# Altium PCB URESP_PULSER.PcbDoc
Units mm, origin at the board's own origin, x right, y up, seen from the top; angles counter-clockwise.
Board outline 48.66 x 70 mm, 2 copper layers (Top Layer, Bottom Layer); 54 components, 75 nets, 259 pads, 70 vias.
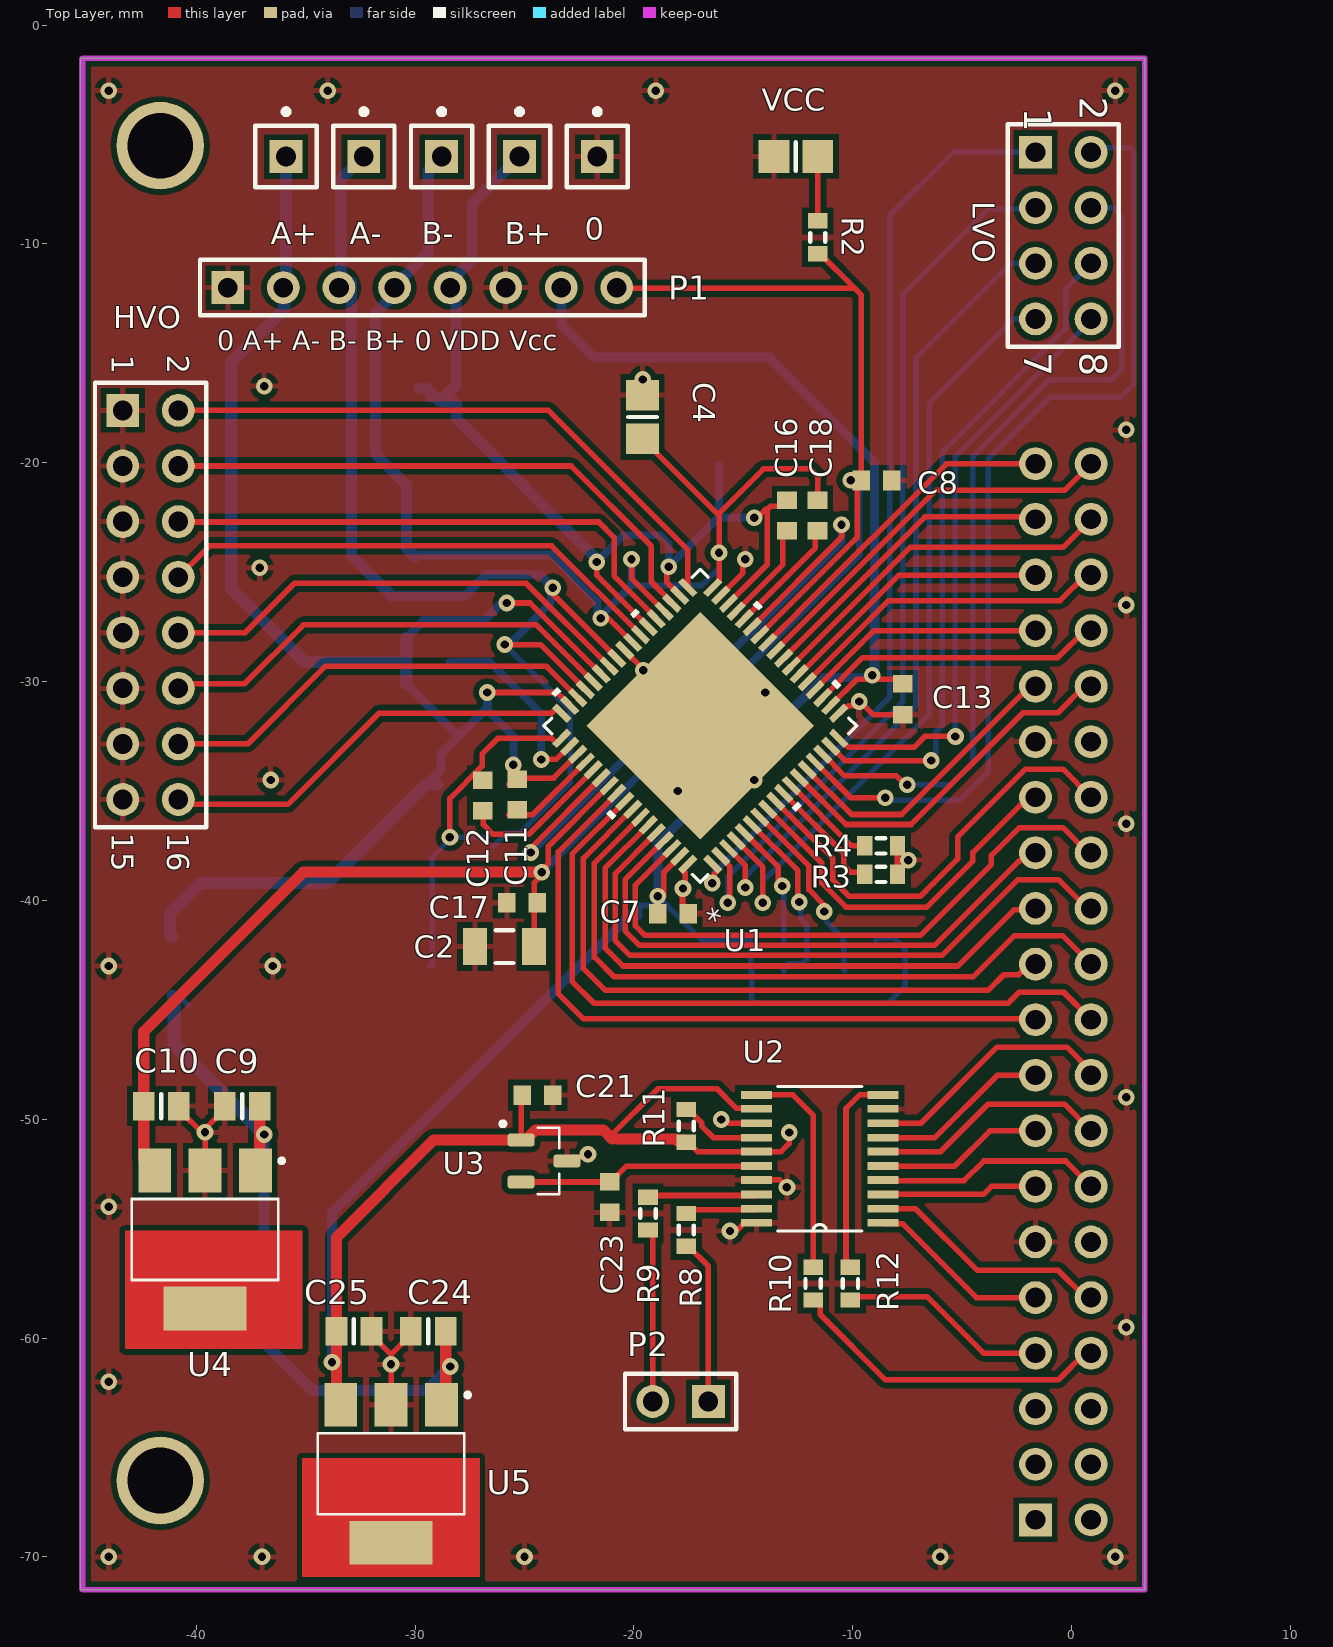
[diagram p0: Top Layer view]
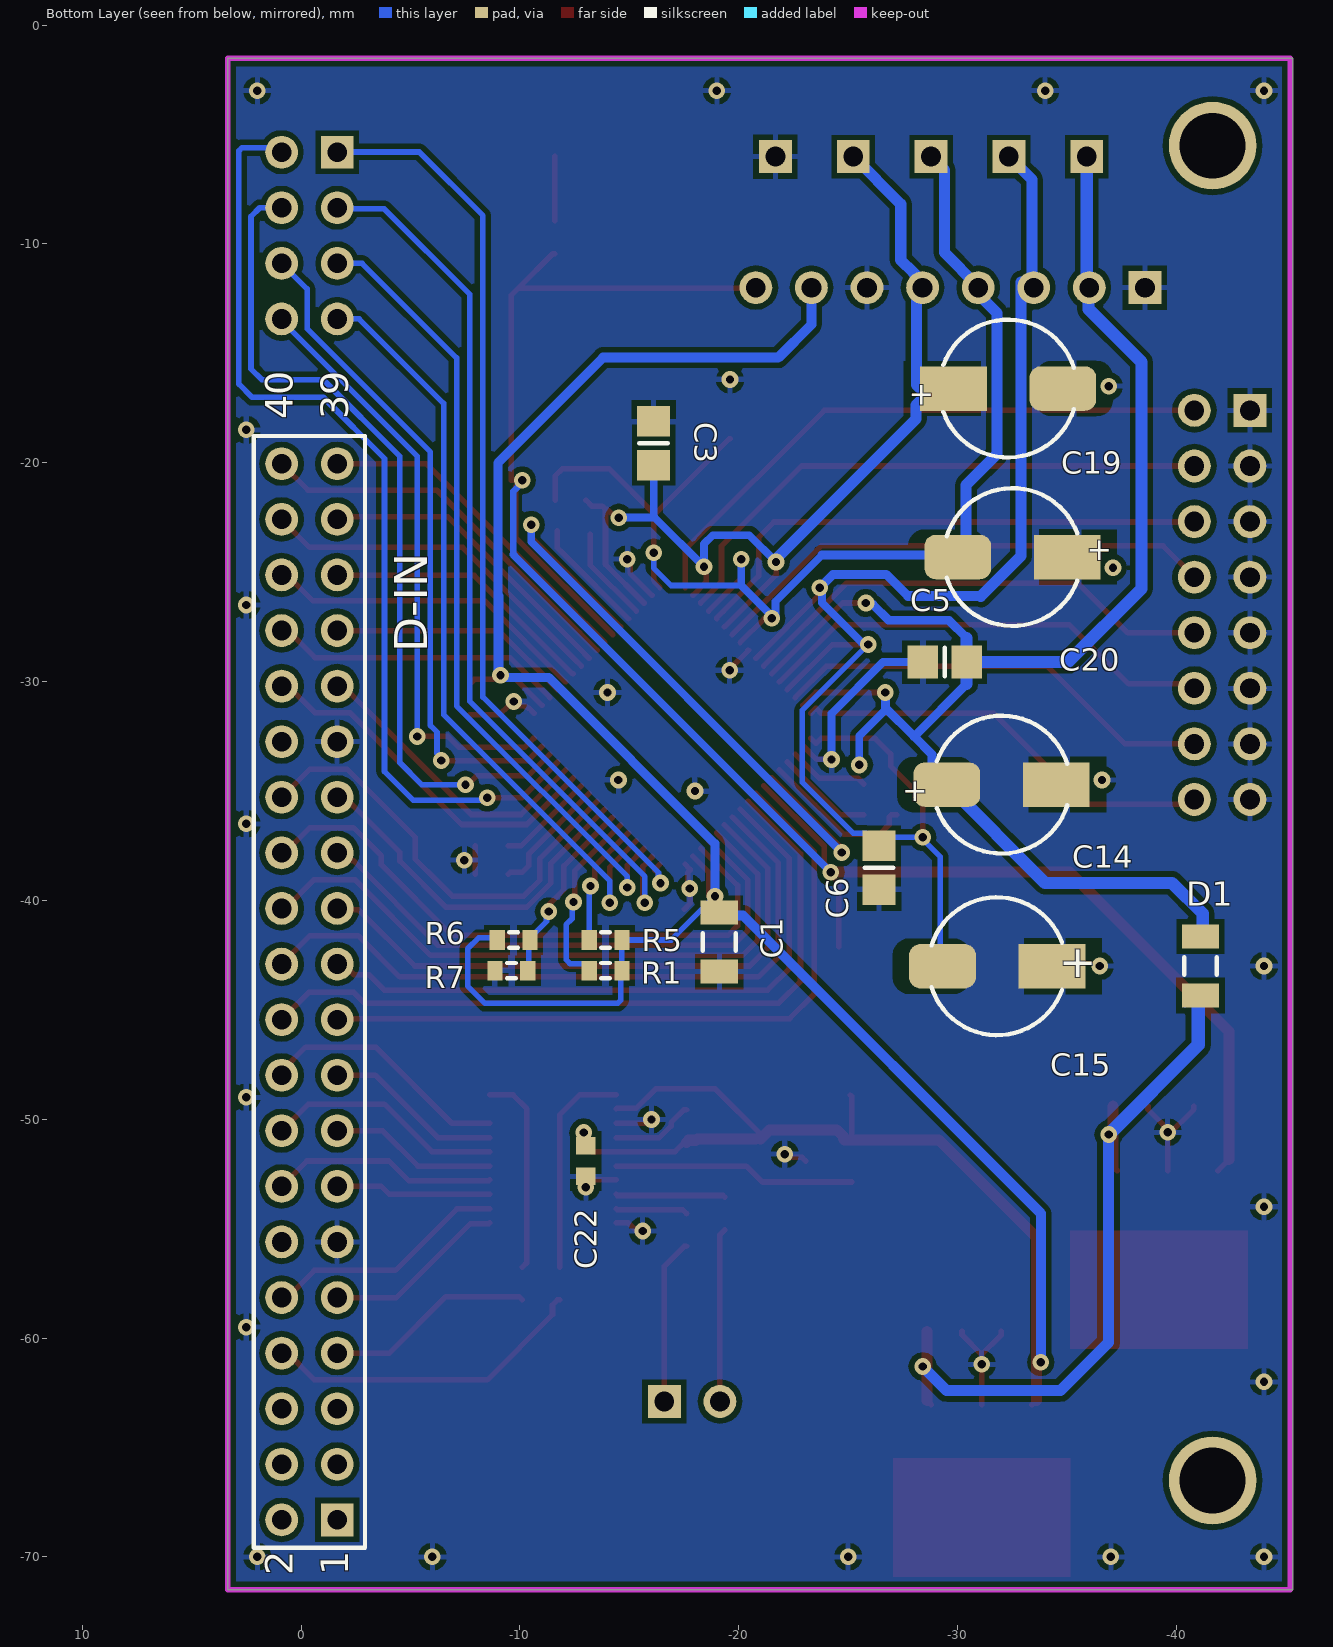
[diagram p1: Bottom Layer view, seen from below]

## Layer stack, top to bottom
Top Solder: solder mask 0.0102, Solder Resist, Dk 3.5
Top Layer: signal copper 0.0356
Dielectric 1: dielectric 0.32, FR-4, Dk 4.8
Bottom Layer: signal copper 0.0356
Bottom Solder: solder mask 0.0102, Solder Resist, Dk 3.5

## Board outline
-45.31,-71.51 -45.31,-1.51 3.35,-1.51 3.35,-71.51

## Design rules (kind name [scope] priority, off if disabled: settings)
Clearance [All] p1: gap=0.254 ignorepadtopadclearanceinfootprint=FALSE except(0: Arc-Hole Track-Hole SMDPad-Hole THPad-Hole Via-Hole Fill-Hole Poly-Hole Region-Hole Text-Hole; 0.203: Arc-Arc Arc-Track Arc-SMDPad Arc-THPad Arc-Via Arc-Text Track-Track Track-SMDPad Track-THPad Track-Via Track-Text SMDPad-SMDPad SMDPad-THPad SMDPad-Text THPad-Text Via-Text Fill-Text Poly-Text Region-Text Text-Text)
PolygonConnect [All] p1: connectstyle=Relief reliefconductorwidth=0.254 reliefentries=4 polygonreliefangle="90 Angle" airgapwidth=0.254
RoutingVias [All] p1: holewidth=0.711 width=1.27 viastyle="Through Hole" minholewidth=0.3 minwidth=0.635 maxholewidth=0.711 maxwidth=1.27
SolderMaskExpansion [All] p1: expansion=0.102 istentingtop=FALSE
Width [All] p1: maxlimit=0.762 minlimit=0.203 preferedwidth=0.254 minimp=50.000000 maximp=50.000000 favimp=50.000000
30 further rules are at their usual default settings.

## Classes and differential pairs
component class URESP_PULSER_2: C9 C10 C21 C22 C23 C24 C25 D1 P2 R8 R9 R10 R11 R12 U2 U3 U4 U5
component class URESP_PULSER: 0 A+ A- B+ B- C1 C2 C3 C4 C5 C6 C7 C8 C11 C12 C13 C14 C15 C16 C17 C18 C19 C20 D-IN HVO LVO P1 R1 R2 R3 R4 R5 R6 R7 U1 VCC

## Components (designator, comment, footprint, x,y, rotation, side; value= is the part's Value field where it differs from the comment)
0 "" PIN1 -21.676,-6.01 r0 top
A+ "" PIN1 -35.9,-6.01 r0 top
A- "" PIN1 -32.344,-6.01 r0 top
B+ "" PIN1 -25.232,-6.01 r0 top
B- "" PIN1 -28.788,-6.01 r0 top
C1 "" C1206 -19.11,-41.91 r270 bottom value=10uF
C2 "" C1206 -25.91,-42.11 r180 top value=10uF
C3 "" 6-0805_M -16.11,-19.11 r270 bottom value=100nF
C4 "" 6-0805_M -19.61,-17.91 r270 top value=100nF
C5 "" 6-0805_M -29.41,-29.11 r180 bottom value=100nF
C6 "" 6-0805_M -26.41,-38.51 r90 bottom value=100nF
C7 "" 1608[0603] -18.21,-40.61 r180 top value=100nF
C8 "" 1608[0603] -8.91,-20.81 r180 top value=100nF
C9 "" 6-0805_L -37.9,-49.4 r0 top value=10uF
C10 "" 6-0805_L -41.6,-49.4 r180 top value=10uF
C11 "" 1608[0603] -25.335,-35.16 r270 top value=1uF-10V
C12 "" 1608[0603] -26.91,-35.21 r270 top value=1uF-10V
C13 "" 1608[0603] -7.71,-30.81 r90 top value=100nF
C14 "" CAPPR5-6.3X5#1 -32.01,-34.71 r180 bottom value=10uF
C15 "" CAPPR5-6.3x5 -31.81,-43.01 r0 bottom value=10uF
C16 "" 1608[0603] -13.01,-22.41 r270 top value=1uF-10V
C17 "" 1608[0603] -25.11,-40.11 r0 top value=1uF
C18 "" 1608[0603] -11.61,-22.41 r270 top value=1uF-10V
C19 "" CAPPR5-6.3X5#2 -32.31,-16.61 r180 bottom value=10uF
C20 "" CAPPR5-6.3X5#2 -32.51,-24.31 r0 bottom value=10uF
C21 "" 1608[0603] -24.4,-48.9 r180 top value=100nF
C22 "" 1608[0603] -13.01,-51.91 r90 bottom value=100nF
C23 "" 1608[0603] -21.11,-53.56 r90 top value=100nF
C24 "" 6-0805_L -29.4,-59.7 r0 top value=10uF
C25 "" 6-0805_L -32.8,-59.7 r180 top value=10uF
D1 "D Schottky" C1206 -41.1,-43 r270 bottom
D-IN "" HDR2X20 -1.65,-68.31 r90 bottom
HVO "" HDR2X8 -43.36,-17.61 r270 top
LVO "Header 4X2" HDR2X4 -1.65,-5.81 r270 top
P1 "Header 8" HDR1X8 -38.56,-12 r0 top
P2 "" HDR1X2 -16.6,-62.9 r180 top
R1 "" J1-0603 -13.91,-43.21 r0 bottom value=10K
R2 "" J1-0603 -11.6,-9.7 r270 top value=1K
R3 "" J1-0603 -8.71,-38.81 r180 top value=1K
R4 "" J1-0603 -8.71,-37.51 r180 top value=1K
R5 "" J1-0603 -13.91,-41.81 r0 bottom value=1K
R6 "" J1-0603 -9.71,-41.81 r180 bottom value=10K
R7 "" J1-0603 -9.61,-43.21 r180 bottom value=10K
R8 "" J1-0603 -17.61,-55.06 r270 top value="0 Ohm"
R9 "" J1-0603 -19.36,-54.31 r270 top value="0 Ohm"
R10 "" J1-0603 -11.81,-57.51 r90 top value=1K
R11 "" J1-0603 -17.61,-50.31 r90 top value=10K
R12 "" J1-0603 -10.11,-57.51 r90 top value=1K
U1 "MAX14808ETK+T" 21-0142E_T6800-2 -16.972,-32.025 r135 top value=Value
U2 "AD7302BRUZ-REEL7" SOP65P637X110-20N -11.51,-51.81 r180 top
U3 "ADR280ARTZ-REEL7" SOT96P237X112-3N -24.11,-51.91 r0 top
U4 "LT1129IST-5#PBF" SOT230P700X180-4N -39.6,-55.5 r180 top
U5 "LT1129IST-5#PBF" SOT230P700X180-4N -31.1,-66.2 r180 top
VCC "LED3" 6-0805_M -12.6,-6 r180 top

## Footprints (in the part's own frame and the unit in brackets; to place one, negate y for a bottom-side part, rotate by r counter-clockwise, add the part's x,y. Pads: shape width x height; smd on the part's side, far side on the other; paste and mask are expansions set on the pad)
6-0805_L [mm] "Chip Resistor, Body 2.0x1.2mm, IPC High Density"
  rect 1x1.3 smd: 1(-0.8,0) 2(0.8,0)
  silkscreen extent 0,-0.55 0,0.55, body extent -1.07,-0.7 1.07,0.7, height 0.7
6-0805_M [mm] "Chip Resistor, Body 2.0x1.2mm, IPC Low Density"
  rect 1.4x1.5 smd: 1(-1,0) 2(1,0)
  silkscreen extent 0,-0.65 0,0.65, body extent -1.07,-0.7 1.07,0.7, height 0.7
21-0142E_T6800-2 [mil]
  rect 38x12 smd: 1(-192,160) 2(-192,140) 3(-192,120) 4(-192,100) 5(-192,80) 6(-192,60) 7(-192,40) 8(-192,20) 9(-192,0) 10(-192,-20) 11(-192,-40) 12(-192,-60) 13(-192,-80) 14(-192,-100) 15(-192,-120) 16(-192,-140) 17(-192,-160) 35(192,-160) 36(192,-140) 37(192,-120) 38(192,-100) 39(192,-80) 40(192,-60) 41(192,-40) 42(192,-20) 43(192,0) 44(192,20) 45(192,40) 46(192,60) 47(192,80) 48(192,100) 49(192,120) 50(192,140) 51(192,160)
  rect 12x38 smd: 18(-160,-192) 19(-140,-192) 20(-120,-192) 21(-100,-192) 22(-80,-192) 23(-60,-192) 24(-40,-192) 25(-20,-192) 26(0,-192) 27(20,-192) 28(40,-192) 29(60,-192) 30(80,-192) 31(100,-192) 32(120,-192) 33(140,-192) 34(160,-192) 52(160,192) 53(140,192) 54(120,192) 55(100,192) 56(80,192) 57(60,192) 58(40,192) 59(20,192) 60(0,192) 61(-20,192) 62(-40,192) 63(-60,192) 64(-80,192) 65(-100,192) 66(-120,192) 67(-140,192) 68(-160,192)
  rect 290x290 smd paste-153: 69(0,0)
  silkscreen extent -231,-231 231,231
1608[0603] [mm] "Chip Capacitor, Body 1.6x0.8mm, IPC High Density"
  rect 0.8x0.9 smd: 1(-0.7,0) 2(0.7,0)
  body extent -0.87,-0.48 0.87,0.48, height 1.3
C1206 [mm] "Chip Capacitor, Body 3.2x1.6mm, IPC High Density"
  rect 1.1x1.7 smd: 1(-1.35,0) 2(1.35,0)
  silkscreen extent -0.4,-0.75 0.4,0.75, body extent -1.7,-0.9 1.7,0.9, height 1.3
CAPPR5-6.3X5#1 [mil] "Capacitor, Electrolytic, Radial; Body 6.3 x 5 mm (Dia.xH typ); Pin Spacing 5 mm (typ)"
  rrect50% 120x80 smd: 1(-98.43,0)
  rect 120x80 smd: 2(98.43,0)
  silkscreen extent -117,-124 118,124
CAPPR5-6.3X5#2 [mil] "Capacitor, Electrolytic, Radial; Body 6.3 x 5 mm (Dia.xH typ); Pin Spacing 5 mm (typ)"
  rect 120x80 smd: 1(-98.43,0)
  rrect50% 120x80 smd: 2(98.43,0)
  silkscreen extent -117,-124 118,124
CAPPR5-6.3x5 [mil] "Capacitor, Electrolytic, Radial; Body 6.3 x 5 mm (Dia.xH typ); Pin Spacing 5 mm (typ)"
  rect 120x80 smd: 1(-98.43,0)
  rrect50% 120x80 smd: 2(98.43,0)
  silkscreen extent -117,-124 118,124
HDR1X2 [mm] "Connector; Header; 2 Position"
  rect 1.5x1.5 hole 0.9: 1(0,0)
  round 1.5 hole 0.9: 2(2.54,0)
  silkscreen extent -1.27,-1.27 3.81,1.27
HDR1X8 [mm] "Connector; Header; 8 Position"
  rect 1.5x1.5 hole 0.9: 1(0,0)
  round 1.5 hole 0.9: 2(2.54,0) 3(5.08,0) 4(7.62,0) 5(10.16,0) 6(12.7,0) 7(15.24,0) 8(17.78,0)
  silkscreen extent -1.27,-1.27 19.05,1.27
HDR2X4 [mm] "Connector; Header; 4x2 Position"
  rect 1.5x1.5 hole 0.9: 1(0,0)
  round 1.5 hole 0.9: 2(0,2.54) 3(2.54,0) 4(2.54,2.54) 5(5.08,0) 6(5.08,2.54) 7(7.62,0) 8(7.62,2.54)
  silkscreen extent -1.27,-1.27 8.89,3.81
HDR2X8 [mm] "Connector; Header; 8x2 Position"
  rect 1.5x1.5 hole 0.9: 1(0,0)
  round 1.5 hole 0.9: 2(0,2.54) 3(2.54,0) 4(2.54,2.54) 5(5.08,0) 6(5.08,2.54) 7(7.62,0) 8(7.62,2.54) 9(10.16,0) 10(10.16,2.54) 11(12.7,0) 12(12.7,2.54) 13(15.24,0) 14(15.24,2.54) 15(17.78,0) 16(17.78,2.54)
  silkscreen extent -1.27,-1.27 19.05,3.81
HDR2X20 [mm] "Connector; Header; 20x2 Position"
  rect 1.5x1.5 hole 0.9: 1(0,0)
  round 1.5 hole 0.9: 2(0,2.54) 3(2.54,0) 4(2.54,2.54) 5(5.08,0) 6(5.08,2.54) 7(7.62,0) 8(7.62,2.54) 9(10.16,0) 10(10.16,2.54) 11(12.7,0) 12(12.7,2.54) 13(15.24,0) 14(15.24,2.54) 15(17.78,0) 16(17.78,2.54) 17(20.32,0) 18(20.32,2.54) 19(22.86,0) 20(22.86,2.54) 21(25.4,0) 22(25.4,2.54) 23(27.94,0) 24(27.94,2.54) 25(30.48,0) 26(30.48,2.54) 27(33.02,0) 28(33.02,2.54) 29(35.56,0) 30(35.56,2.54) 31(38.1,0) 32(38.1,2.54) 33(40.64,0) 34(40.64,2.54) 35(43.18,0) 36(43.18,2.54) 37(45.72,0) 38(45.72,2.54) 39(48.26,0) 40(48.26,2.54)
  silkscreen extent -1.27,-1.27 49.53,3.81
J1-0603 [mm] "Chip Resistor, Body 1.6x0.8mm, IPC High Density"
  rect 0.7x0.9 smd: 1(-0.75,0) 2(0.75,0)
  silkscreen extent -0.2,-0.35 0.2,0.35, body extent -0.85,-0.48 0.85,0.48, height 0.9
PIN1 [mm] "Connector; Plug"
  rect 1.5x1.5 hole 0.9: 1(0,0)
  silkscreen extent -1.4,-1.4 1.4,2.17
SOP65P637X110-20N [mil]
  rect 56x14 smd: 1(-114,115) 2(-114,90) 3(-114,64) 4(-114,38) 5(-114,13) 6(-114,-13) 7(-114,-38) 8(-114,-64) 9(-114,-90) 10(-114,-115) 11(114,-115) 12(114,-90) 13(114,-64) 14(114,-38) 15(114,-13) 16(114,13) 17(114,38) 18(114,64) 19(114,90) 20(114,115)
  silkscreen extent -76,-130 76,130
SOT96P237X112-3N [mm]
  rrect50% 1.25x0.61 smd: 1(-1.05,0.96) 2(-1.05,-0.96) 3(1.05,0)
  silkscreen extent -1.98,-1.52 0.7,1.8
SOT230P700X180-4N [mm]
  rect 1.5x2 smd: 1(-2.3,-3.15) 2(0,-3.15) 3(2.3,-3.15)
  rect 3.8x2 smd: 4(0,3.15)
  silkscreen extent -3.6,-3.7 3.35,1.85, body extent -3.25,-3.5 3.25,3.5, height 1.8

## Part data
0 A+ A- B+ B-: library part Socket, "Socket", LatestRevisionDate=17-Jul-2002, LatestRevisionNote="Re-released for DXP Platform.", Publisher="Altium Limited"
C1 C2: library part "Cap Pol3", "Polarized Capacitor (Surface Mount)", LatestRevisionDate=29-May-2009, LatestRevisionNote="IPC-7351 Footprint Added.", PackageDescription="Chip Capacitor", PackageReference=C0805, Published=8-Jun-2000, Publisher="Altium Limited"
C3 C4 C5 C6 C7 C8 C9 C10 C11 C12 C13 C14 C15 C16 C17 C18 C19 C20 C21 C22 C23 C24 C25: library part "Cap Semi", "Capacitor (Semiconductor SIM Model)", LatestRevisionDate=29-May-2009, LatestRevisionNote="IPC-7351 Footprint Added.", PackageDescription="Chip Capacitor", PackageReference=C1206, Published=8-Jun-2000, Publisher="Altium Limited"
D1: "Schottky Diode", Code_JEDEC=DO-214-AA, LatestRevisionDate=17-Jul-2002, LatestRevisionNote="Re-released for DXP Platform.", PackageDescription="DO-214-AA/SMB; 2 C-Bend Leads; Body 5.3 x 3.6 mm, inc. leads (LxW)", PackageReference=SMB, Published=8-Jun-2000, Publisher="Altium Limited"
D-IN: library part "Header 20X2", "Header, 20-Pin, Dual row", LatestRevisionDate=17-Jul-2002, LatestRevisionNote="Re-released for DXP Platform.", Publisher="Altium Limited"
HVO: library part "Header 8X2H", "Header, 8-Pin, Dual row, Right Angle", LatestRevisionDate=17-Jul-2002, LatestRevisionNote="Re-released for DXP Platform.", Publisher="Altium Limited"
LVO: "Header, 4-Pin, Dual row", LatestRevisionDate=17-Jul-2002, LatestRevisionNote="Re-released for DXP Platform.", Publisher="Altium Limited"
P1: "Header, 8-Pin", LatestRevisionDate=17-Jul-2002, LatestRevisionNote="Re-released for DXP Platform.", Publisher="Altium Limited"
P2: library part "Header 2", "Header, 2-Pin", LatestRevisionDate=17-Jul-2002, LatestRevisionNote="Re-released for DXP Platform.", Publisher="Altium Limited"
R1 R2 R3 R4 R5 R6 R7 R8 R9 R10 R11 R12: library part Res3, "Resistor", LatestRevisionDate=29-May-2009, LatestRevisionNote="IPC-7351 Footprint Added.", PackageDescription="Chip Resistor", PackageReference=J1-0603, Published=8-Jun-2000, Publisher="Altium Limited"
U1: "Imported", Manufacturer_Name=Maxim, Manufacturer_Part_Number=MAX14808ETK+T, RefDes=RefDes, Type=DEV, Vendor=Maxim
U2: "8-Bit Digital-to-Analog Converters", Package=None, Availability=Unavailable, MF="{'manufacturer': u'Analog Devices'}", MP=AD7302BRUZ-REEL7, Price=None
U3 U4 U5: Package=None, Availability=Unavailable, MF="{'manufacturer': u'Analog Devices'}", Price=None
  U3: MP=ADR280ARTZ-REEL7
  U4 U5: MP=LT1129IST-5#PBF
VCC: "Typical BLUE SiC LED", DatasheetVersion=16-Apr-2002, LatestRevisionDate=17-Dec-2003, LatestRevisionNote="PCB Footprint replaced.", PackageDescription="SM LED; 2 C-Bend Leads; Body 3.5 x 2.8 x 1.9 mm, inc leads (LxWxH typ)", PackageReference=3.5X2.8X1.9, PackageVersion=16-Apr-2002, Published=8-Jun-2000, Publisher="Altium Limited"

## Free pads (board coordinates)
  round 4 hole 3: 0(-41.65,-66.51) 0(-41.65,-5.51)

## Via types
v1: diameter 0.762, hole 0.381, Top Layer to Bottom Layer, tented both sides, 70 vias

## Nets (pads, with @x,y where several pads share a name; then routed paths per layer and width w, separated by ;. In a path a pad name is that pad's centre, name@x,y a point inside that pad or via, vN(x,y) a via of type N, cw(c..) or ccw(c..) an arc to the next point about the centre after c; other vN are vias at no path point)
+HVA: A+.1 C5.2 C11.1 C14.1 D1.1 P1.2 U1.46 U1.50 U1.54 | length 79.2
  Top Layer w0.254: v1(-26.698,-30.5) -23.526,-30.5 U1.50 ; v1(-25.81,-26.41) -24.742,-26.41 U1.46 ; C11.1@-25.71,-34.685 -25.437,-34.412 -23.67,-34.412 U1.54
  Bottom Layer w0.254: -26.698,-31.302 v1(-26.698,-30.5) ; v1@-25.878,-26.478 v1(-25.81,-26.41)
  Bottom Layer w0.356: -26.698,-31.302 -25.51,-32.49 v1(-25.51,-33.81)
  Bottom Layer w0.406: -30.41,-30.11 -28.01,-32.51 ; -30.41,-28.01 -29.6,-27.2 -26.848,-27.2 -26.126,-26.478 v1@-25.878,-26.478 ; C14.1 -28.822,-34.022 -28.822,-33.322 -28.01,-32.51 ; v1(-26.698,-30.5) -26.698,-31.198 -28.01,-32.51
  Bottom Layer w0.559: D1.1 -41.2,-41.55 -41.2,-40.6 -39.8,-39.2 -34,-39.2 C14.1 C14.1@-28.973,-34.71 ; A+.1 -35.9,-12 -35.982,-12.082 -35.982,-12.982 -38.4,-15.4 -38.4,-25.76 -35.05,-29.11 C5.2 ; -30.41,-30.11 C5.2 ; -30.41,-28.01 C5.2
+HVB: B+.1 C3.2 C16.1 C19.1 P1.5 U1.32 U1.36 U1.40 | length 49.8
  Top Layer w0.254: v1@-21.71,-24.534 -21.71,-25.132 U1.40 ; v1(-18.41,-24.76) -18.507,-24.857 -18.507,-25.461 U1.36 ; U1.32 -13.91,-24.652 -13.91,-22.132 ; v1(-14.51,-22.51) -14.373,-22.51 -13.994,-22.132 -13.91,-22.132 ; C16.1 -13.283,-21.983 -13.761,-21.983 -13.91,-22.132
  Bottom Layer w0.254: C19.1@-29.394,-17.11 C19.1@-28.794,-17.11 ; v1@-21.788,-24.451 v1(-21.705,-24.534) ; -16.16,-22.51 -16.11,-22.46
  Bottom Layer w0.356: v1(-21.705,-24.534) -20.481,-23.31 -18.81,-23.31 -18.41,-23.71 v1(-18.41,-24.76) -16.16,-22.51 v1(-14.51,-22.51) ; -16.11,-22.46 C3.2
  Bottom Layer w0.508: C19.1 -29.49,-16.61 -28.892,-17.208 -28.259,-17.208 -28.095,-17.372 -28.095,-18.005 -21.753,-24.347 -21.753,-24.417 v1@-21.788,-24.451 ; C19.1@-28.794,-17.11 -28.129,-16.445 -28.129,-12.608 -28.162,-12.576 -28.162,-11.804 -28.21,-11.755 -28.21,-11.542 -27.975,-11.306 -27.975,-11.303 -27.4,-10.728 -27.4,-8.178 B+.1
-HVA: A-.1 C6.2 C12.1 C15.2 P1.3 U1.44 U1.48 U1.52 | length 71
  Top Layer w0.254: v1(-28.41,-37.11) -28.41,-35.336 -26.935,-33.861 -26.935,-33.31 -26.224,-32.599 -23.765,-32.599 -23.548,-32.817 -23.512,-32.817 U1.52 ; v1(-25.91,-28.31) -24.279,-28.31 U1.48 ; v1@-23.71,-25.71 -23.71,-26.005 U1.44
  Bottom Layer w0.254: C15.2 -29.21,-42.91 -29.21,-38.01 -28.31,-37.11 C6.2@-26.71,-37.11 ; C6.2 -25.837,-36.937 -25.237,-36.937 -22.91,-34.61 -22.91,-31.31 v1(-25.91,-28.31) -25.813,-28.213 v1@-25.613,-28.213 ; v1@-23.803,-25.806 v1(-23.706,-25.708)
  Bottom Layer w0.356: v1@-25.613,-28.213 -23.803,-26.403 v1@-23.803,-25.806
  Bottom Layer w0.406: -27.74,-26.1 -26.74,-25.1 -24.314,-25.1 v1(-23.706,-25.708)
  Bottom Layer w0.457: -31.06,-26.1 -27.74,-26.1
  Bottom Layer w0.508: P1.3 -33.585,-12 -33.48,-11.835 -33.4,-11.712 -33.4,-7.066 A-.1 ; P1.3@-32.9,-11.74 -32.9,-24.26 -31.06,-26.1
-HVB: B-.1 C4.2 C18.1 C20.2 P1.4 U1.34 U1.38 U1.42 | length 58.6
  Top Layer w0.254: v1@-21.61,-27.11 -21.168,-27.11 U1.42 ; v1(-20.11,-24.41) -20.11,-25.295 U1.38 ; C4.2 -19.56,-18.91 -18.987,-19.483 -18.987,-19.533 -16.11,-22.41 v1(-16.11,-24.11) -16.11,-25.379 -16.164,-25.433 -16.164,-25.469 U1.34 ; -16.16,-22.36 -14.085,-20.285 -11.935,-20.285 -11.61,-20.61 C18.1
  Bottom Layer w0.254: v1@-21.672,-27.048 v1@-21.61,-27.11 ; -20.11,-25.61 -16.91,-25.61 -16.11,-24.81 v1(-16.11,-24.11)
  Bottom Layer w0.356: -23.81,-24.21 -21.672,-26.348 v1@-21.672,-27.048 ; v1@-21.61,-27.11 -20.11,-25.61 v1(-20.11,-24.41)
  Bottom Layer w0.406: C20.2@-30.01,-24.21 -23.81,-24.21
  Bottom Layer w0.508: P1.4 -30.94,-11.94 -29.4,-10.4 -29.4,-6.622 B-.1 ; P1.4@-30.79,-12.15 -31.807,-13.167 -31.807,-19.603 -30.391,-21.019 -30.391,-23.929 C20.2
  other v1: -21.51,-27.11
CLK: D-IN.27 U1.8 | length 16.9
  Top Layer w0.254: U1.8 -11.41,-38.305 -11.41,-39.215 -10.315,-40.31 -6.61,-40.31 -4.51,-38.21 -4.51,-37.81 -2.366,-35.666 -2.363,-35.666 -1.987,-35.29 D-IN.27
DAC-A: P2.1 R8.2 | length 7.6
  Top Layer w0.254: R8.2 -17.51,-55.81 -16.6,-56.72 P2.1
DAC-B: P2.2 R9.2 | length 7.9
  Top Layer w0.254: R9.2 -19.14,-55.28 P2.2
DAC-REF: C23.2 U2.16 U3.2 | length 11.1
  Top Layer w0.254: U3.2 -21.12,-52.87 C23.2 -21.06,-52.86 -20.34,-52.14 U2.16
DAC_0: D-IN.18 U2.8 | length 11.6
  Top Layer w0.254: U2.8 -6.884,-50.184 -3.41,-46.71 -0.21,-46.71 0.89,-47.81 D-IN.18
DAC_1: D-IN.17 U2.7 | length 8.1
  Top Layer w0.254: U2.7 -6.245,-50.845 -3.39,-47.99 D-IN.17
DAC_2: D-IN.16 U2.6 | length 10.9
  Top Layer w0.254: U2.6 -5.98,-51.48 -3.81,-49.31 -0.33,-49.31 D-IN.16
DAC_3: D-IN.15 U2.5 | length 7.6
  Top Layer w0.254: U2.5 -5.34,-52.14 -3.73,-50.53 D-IN.15
DAC_4: D-IN.14 U2.4 | length 10.4
  Top Layer w0.254: U2.4 -8.58,-52.81 -4.91,-52.81 -4.01,-51.91 -0.27,-51.91 D-IN.14
DAC_5: D-IN.13 U2.3 | length 7.1
  Top Layer w0.254: U2.3 -4.036,-53.436 -3.67,-53.07 D-IN.13
DAC_6: D-IN.10 U2.2 | length 11.2
  Top Layer w0.254: U2.2 -7.124,-54.096 -4.31,-56.91 -0.61,-56.91 0.63,-58.15 D-IN.10
DAC_7: D-IN.9 U2.1 | length 8.4
  Top Layer w0.254: U2.1 -8.577,-54.769 -7.732,-54.769 -4.351,-58.15 D-IN.9
DAC_A/B: D-IN.8 R10.1 | length 15
  Top Layer w0.254: R10.1 -11.71,-58.26 -11.487,-58.483 -11.487,-58.933 -8.51,-61.91 -0.61,-61.91 0.61,-60.69 D-IN.8
DAC_WR: D-IN.7 R12.1 | length 9.6
  Top Layer w0.254: R12.1 -9.96,-58.11 -6.61,-58.11 -4.03,-60.69 D-IN.7
DN1: D-IN.25 U1.65 | length 25.6
  Top Layer w0.254: U1.65 -20.407,-39.052 -20.407,-41.393 -19.743,-42.057 -6.257,-42.057 -2.386,-38.186 -2.343,-38.186 -1.987,-37.83 D-IN.25
DN2: D-IN.23 U1.63 | length 27.5
  Top Layer w0.254: U1.63 -21.322,-38.529 -21.322,-42.178 -20.5,-43 -5.2,-43 -2.632,-40.432 -1.712,-40.432 D-IN.23
DN3: D-IN.21 U1.61 | length 29.8
  Top Layer w0.254: U1.61 -22.31,-38.081 -22.31,-43.11 -21.32,-44.1 -3.8,-44.1 -3.1,-43.4 -2.422,-43.4 -1.932,-42.91 D-IN.21
DN4: D-IN.19 U1.59 | length 32.6
  Top Layer w0.254: U1.59 -23.45,-37.784 -23.45,-44.27 -22.32,-45.4 -1.7,-45.4 D-IN.19
DN5: D-IN.33 U1.21 | length 11.2
  Top Layer w0.254: U1.21 -9.025,-27.67 D-IN.33
DN6: D-IN.35 U1.23 | length 12.7
  Top Layer w0.254: U1.23 -12.41,-29.654 -7.906,-25.15 -1.67,-25.15 D-IN.35
DN7: D-IN.37 U1.25 | length 14.2
  Top Layer w0.254: U1.25 -12.694,-28.465 -6.704,-22.475 -1.765,-22.475 D-IN.37
DN8: D-IN.39 U1.27 | length 15.6
  Top Layer w0.254: U1.27 -13.412,-27.746 -12.525,-26.859 -12.525,-26.85 -5.725,-20.05 D-IN.39
DP1: D-IN.26 U1.66 | length 28
  Top Layer w0.254: U1.66 -19.95,-39.313 -19.95,-41.15 -19.5,-41.6 -6.9,-41.6 -3.663,-38.363 -3.663,-37.95 -2.388,-36.675 -0.4,-36.675 0.755,-37.83 D-IN.26
DP2: D-IN.24 U1.64 | length 29.7
  Top Layer w0.254: U1.64 -20.864,-38.791 -20.864,-41.83 -20.18,-42.514 -5.914,-42.514 -2.45,-39.05 -0.6,-39.05 0.72,-40.37 D-IN.24
DP3: D-IN.22 U1.62 | length 31.7
  Top Layer w0.254: U1.62 -21.81,-38.299 -21.81,-42.59 -20.9,-43.5 -4.5,-43.5 -2.61,-41.61 -0.41,-41.61 D-IN.22
DP4: D-IN.20 U1.60 | length 34.1
  Top Layer w0.254: U1.60 -22.822,-37.874 -22.822,-43.698 -21.82,-44.7 -2.9,-44.7 -2.4,-44.2 -0.36,-44.2 D-IN.20
DP5: D-IN.34 U1.20 | length 13.5
  Top Layer w0.254: U1.20 -9.547,-28.91 -0.635,-28.91 0.605,-27.67 D-IN.34
DP6: D-IN.36 U1.22 | length 15
  Top Layer w0.254: U1.22 U1.22 -8.375,-26.3 -0.525,-26.3 0.645,-25.13 D-IN.36
DP7: D-IN.38 U1.24 | length 16.5
  Top Layer w0.254: U1.24 -12.483,-28.973 -7.38,-23.87 -0.39,-23.87 D-IN.38
DP8: D-IN.40 U1.26 | length 17.9
  Top Layer w0.254: U1.26 -12.724,-27.776 -6.197,-21.25 -0.31,-21.25 D-IN.40
FPGA_3.3v: D-IN.30
FPGA_5v: D-IN.12
GND: 0.1 C1.2 C2.2 C3.1 C4.1 C5.1 C6.1 C7.1 C8.1 C9.1 C10.1 C13.1 C14.2 C15.1 C17.1 C19.2 C20.1 C21.1 C22.1 C23.1 C24.1 C25.1 D-IN.11 D-IN.29 HVO.1 HVO.3 HVO.5 HVO.7 HVO.9 HVO.11 HVO.13 HVO.15 P1.1 P1.6 R3.1 R4.1 R7.1 U1.18 U1.33 U1.43 U1.53 U1.68 U1.69 U2.9 U2.13 U2.17 U2.20 U3.3 U4.2 U5.2 VCC.2 | length 35.6
  Top Layer w0.254: C10.1 -40.8,-49.55 v1@-39.6,-50.75 ; U4.2 v1@-39.6,-50.75 ; C9.1 -38.7,-49.55 -39.6,-50.45 v1@-39.6,-50.75 ; C25.1 -32,-59.85 -31.1,-60.75 ; U5.2 -31.1,-60.75 ; C24.1 -30.2,-59.85 -31.1,-60.75 ; v1@-24.335,-33.56 v1(-24.235,-33.56) -23.555,-33.56 -22.954,-32.959 U1.53 ; U3.3 -22.898,-51.748 -22.385,-51.748 -22.237,-51.6 v1(-22.1,-51.6) ; U1.43 -20.444,-28.576 v1@-19.61,-29.41 ; v1@-17.78,-39.51 -17.78,-40.14 C7.1@-17.51,-40.41 ; U1.68 -17.78,-38.58 -17.78,-38.616 -17.66,-38.737 -17.66,-39.223 v1@-17.51,-39.373 ; U1.33 -15.035,-25.059 -15.035,-24.535 v1(-14.91,-24.41) ; v1(-16.01,-50.01) -15.836,-50.184 U2.13 ; v1(-15.61,-55.11) -15.318,-55.11 -14.939,-54.731 U2.20 ; U2.17 -13.345,-52.775 v1(-13.01,-53.11) ; U1.18 -10.417,-31.217 -10.381,-31.217 -10.307,-31.143 -10.243,-31.143 -10.21,-31.11 -9.473,-31.11 -9.073,-31.51 C13.1 ; R3.1 -7.96,-38.16 ; R4.1 -7.96,-38.16 ; v1@-7.41,-38.11 v1(-7.46,-38.16) -7.96,-38.16
  Bottom Layer w0.356: C5.1 -26.59,-29.11 -24.235,-31.465 v1(-24.235,-33.56)
  other v1: -44,-70 -37,-70 -25,-70 -6,-70 2,-70 -44,-62 -31.1,-61.2 2.5,-59.5 -44,-54 -39.6,-50.6 2.5,-49 -44,-43 -36.5,-43 -17.76,-39.46 2.5,-36.5 -18,-35 -36.6,-34.5 -14.5,-34.5 -9.71,-30.91 -14,-30.5 -19.58,-29.484 2.5,-26.5 -37.1,-24.8 2.5,-18.5 -36.9,-16.5 -19.6,-16.2 -44,-3 -34,-3 -19,-3 2,-3
LVOUT-1: LVO.1 U1.1 | length 42.8
  Top Layer w0.254: v1(-16.421,-39.21) -16.324,-39.113 -16.324,-38.776 -16.164,-38.616 -16.164,-38.58 U1.1
  Bottom Layer w0.254: v1(-16.421,-39.21) -16.331,-39.12 -16.331,-38.731 -8.31,-30.71 -8.31,-8.71 -5.4,-5.8 -1.66,-5.8 LVO.1
LVOUT-2: LVO.3 U1.2 | length 41.3
  Top Layer w0.254: U1.2 -16.038,-38.024 -15.618,-38.444 -15.618,-39.112 -15.621,-39.115 -15.621,-40.021 v1(-15.71,-40.11)
  Bottom Layer w0.254: v1(-15.71,-40.11) -15.71,-38.91 -7.71,-30.91 -7.71,-12.31 -3.8,-8.4 LVO.3@-1.495,-8.4
LVOUT-3: LVO.5 U1.3 | length 36.8
  Top Layer w0.254: U1.3 -14.91,-38.397 v1(-14.91,-39.41)
  Bottom Layer w0.254: v1(-14.91,-39.41) -14.91,-38.91 -7.11,-31.11 -7.11,-15.21 -2.79,-10.89 LVO.5
LVOUT-4: LVO.7 U1.4 | length 35.8
  Top Layer w0.254: U1.4 -14.11,-38.479 v1(-14.11,-40.11)
  Bottom Layer w0.254: v1(-14.11,-40.11) -14.11,-39.11 -6.51,-31.51 -6.51,-17.29 -2.65,-13.43 LVO.7
LVOUT-5: LVO.2 U1.14 | length 44.3
  Top Layer w0.254: U1.14 -10.095,-35.31 v1(-8.51,-35.31)
  Bottom Layer w0.254: v1(-8.51,-35.31) -8.399,-35.421 -5.121,-35.421 -3.81,-34.11 -3.81,-19.81 -1.01,-17.01 2.241,-17.01 2.847,-16.404 2.847,-5.749 2.698,-5.6 1.1,-5.6 LVO.2
LVOUT-6: LVO.4 U1.15 | length 38.8
  Top Layer w0.254: U1.15 -10.376,-34.31 -8.01,-34.31 -7.61,-34.71 v1(-7.51,-34.71)
  Bottom Layer w0.254: v1(-7.51,-34.71) -5.51,-34.71 -4.51,-33.71 -4.51,-19.71 -1.01,-16.21 1.79,-16.21 2.29,-15.71 2.29,-8.75 1.89,-8.35 LVO.4
LVOUT-7: LVO.6 U1.16 | length 30.6
  Top Layer w0.254: U1.16 -10.358,-33.61 v1(-6.41,-33.61)
  Bottom Layer w0.254: v1(-6.41,-33.61) -6.41,-33.473 -6.21,-33.273 -6.21,-32.31 -5.91,-32.01 -5.91,-19.51 -0.275,-13.875 -0.275,-12.055 LVO.6
LVOUT-8: LVO.8 U1.17 | length 27.4
  Top Layer w0.254: U1.17 -10.614,-32.599 -10.204,-33.01 -7.21,-33.01 -6.71,-32.51 v1(-5.31,-32.51)
  Bottom Layer w0.254: v1(-5.31,-32.51) -5.31,-19.71 0.89,-13.51 LVO.8
MODE0: D-IN.32 U1.12 | length 16.8
  Top Layer w0.254: U1.12 -10.309,-36.532 -7.332,-36.532 -2.225,-31.425 -0.625,-31.425 0.59,-30.21 D-IN.32
MODE1: D-IN.31 U1.13 | length 13.7
  Top Layer w0.254: U1.13 -10.048,-36.075 -7.775,-36.075 -1.91,-30.21 D-IN.31
NCLK: D-IN.28 U1.9 | length 20.3
  Top Layer w0.254: U1.9 -12.499,-36.498 -10.91,-38.087 -10.91,-39.065 -10.165,-39.81 -6.91,-39.81 -6.335,-39.235 -5.21,-38.11 -5.21,-37.11 -2.1,-34 -0.4,-34 D-IN.28
NetC9_2: C9.2 C24.2 D1.2 U4.1 U5.1 | length 34.5
  Top Layer w0.254: U4.1 U4.1@-37.1,-52.15 ; U5.1 U5.1@-28.6,-62.85
  Top Layer w0.508: U4.1@-37.1,-52.15 C9.2 ; U5.1@-28.6,-62.85 C24.2
  Bottom Layer w0.254: D1.2@-40.8,-44.35 D1.2@-40.377,-44.773
  Bottom Layer w0.508: D1.2 D1.2@-41,-44.45 ; v1(-36.9,-50.7) -36.9,-60.2 -34.7,-62.4 -29.5,-62.4 v1(-28.4,-61.3)
  Bottom Layer w0.61: D1.2@-41,-44.45 -41,-46.6 v1(-36.9,-50.7)
NetC11_2: C11.2 U1.55 | length 4.5
  Top Layer w0.254: C11.2@-25.71,-36.085 -24.624,-36.085 U1.55
NetC12_2: C12.2 U1.56 | length 7.2
  Top Layer w0.254: C12.2@-27.21,-36.085 -26.976,-36.085 -26.878,-36.183 -26.878,-36.542 -26.435,-36.985 -24.806,-36.985 -23.46,-35.639 U1.56
NetC16_2: C16.2 U1.31 | length 4.4
  Top Layer w0.254: U1.31 -13.21,-24.671 C16.2@-13.21,-23.275
NetC18_2: C18.2 U1.30 | length 5.4
  Top Layer w0.254: U1.30 -11.981,-24.16 -11.71,-23.889 C18.2@-11.71,-23.11
NetR1_2: R1.2 U1.6 | length 8.5
  Top Layer w0.254: U1.6 -12.51,-38.642 -12.51,-40.016 v1(-12.449,-40.077)
  Bottom Layer w0.254: R1.2 -13.16,-43.11 -12.937,-42.887 -12.287,-42.887 -12.11,-42.71 -12.11,-41.11 -12.381,-40.839 -12.381,-40.145 v1(-12.449,-40.077)
NetR2_1: R2.1 VCC.1 | length 3
  Top Layer w0.254: R2.1 VCC.1
NetR3_2: R3.2 U1.10 | length 5.6
  Top Layer w0.254: U1.10 -10.41,-37.868 -10.41,-38.41 -10.11,-38.71 -9.56,-38.71 R3.2
NetR4_2: R4.2 U1.11 | length 4.5
  Top Layer w0.254: U1.11 -10.05,-37.51 R4.2
NetR5_2: R5.2 U1.5 | length 5.6
  Top Layer w0.254: U1.5 -13.41,-38.461 -13.41,-39.11 -13.221,-39.299 v1(-13.221,-39.344)
  Bottom Layer w0.254: v1(-13.221,-39.344) -13.16,-39.405 R5.2
NetR6_2: R6.2 R7.2 U1.7 | length 8.8
  Top Layer w0.254: U1.7 -12.01,-38.424 -12.01,-39.51 -11.31,-40.21 v1(-11.31,-40.51)
  Bottom Layer w0.254: v1@-11.31,-40.31 -11.213,-40.407 -11.213,-40.957 -10.46,-41.71 R6.2 -10.41,-41.86 -10.41,-43.16 R7.2
NetR8_1: R8.1 U2.19 | length 3.3
  Top Layer w0.254: R8.1 -17.447,-54.147 -14.456,-54.147 U2.19
NetR9_1: R9.1 U2.18 | length 5
  Top Layer w0.254: R9.1 -19.286,-53.486 -14.456,-53.486 U2.18
NetR10_2: R10.2 U2.11 | length 9.9
  Top Layer w0.254: U2.11 -12.731,-48.889 -11.81,-49.81 R10.2
NetR11_2: R11.2 U2.14 | length 3.8
  Top Layer w0.254: R11.2 -17.51,-49.56 -16.91,-50.16 -16.91,-50.31 -16.375,-50.845 U2.14
NetR12_2: R12.2 U2.10 | length 9.3
  Top Layer w0.254: R12.2 -10.31,-56.56 -10.31,-49.51 -9.689,-48.889 U2.10
OUT-1: HVO.16 U1.51 | length 19.5
  Top Layer w0.254: HVO.16 -40.6,-35.61 -35.81,-35.61 -31.65,-31.45 -23.765,-31.45 -23.548,-31.233 -23.512,-31.233 U1.51
OUT-2: HVO.14 U1.49 | length 20.3
  Top Layer w0.254: HVO.14 -37.65,-32.85 -34.11,-29.31 -23.997,-29.31 U1.49
OUT-3: HVO.12 U1.47 | length 21.2
  Top Layer w0.254: HVO.12 -40.62,-30.11 -37.81,-30.11 -35.11,-27.41 -24.461,-27.41 U1.47
OUT-4: HVO.10 U1.45 | length 22.2
  Top Layer w0.254: HVO.10 -37.77,-27.77 -35.51,-25.51 -24.924,-25.51 U1.45
OUT-5: HVO.8 U1.41 | length 23.4
  Top Layer w0.254: HVO.8 -39.39,-23.8 -23.76,-23.8 U1.41
OUT-6: HVO.6 U1.39 | length 24.7
  Top Layer w0.254: HVO.6 -40.8,-22.71 -21.61,-22.71 -20.91,-23.41 -20.91,-25.177 -19.306,-26.782 -18.984,-27.104 U1.39
OUT-7: HVO.4 U1.37 | length 26.1
  Top Layer w0.254: HVO.4 -22.87,-20.15 -19.21,-23.81 -19.21,-25.44 -18.265,-26.385 U1.37
OUT-8: HVO.2 U1.35 | length 27.6
  Top Layer w0.254: HVO.2 -23.91,-17.61 -17.547,-23.973 U1.35
VCC: C2.1 C8.2 C10.2 C17.2 P1.8 R2.2 U1.28 U1.58 U4.3 | length 92.2
  Top Layer w0.254: U4.3@-42.4,-51.85 U4.3 ; C2.1 -24.56,-39.197 -24.21,-38.847 v1(-24.21,-38.71) -24.21,-38.61 -23.91,-38.31 -23.91,-37.526 U1.58 ; P1.8 -20.755,-12.025 -9.925,-12.025 ; U1.28 -9.801,-23.417 -9.801,-21.099 v1(-10.1,-20.8) -9.62,-20.8 C8.2 -9.61,-12.34 -9.925,-12.025 ; R2.2 -11.5,-10.45 -9.925,-12.025
  Top Layer w0.508: U4.3@-42.4,-51.85 C10.2 -42.4,-46 -35.11,-38.71 v1(-24.21,-38.71)
  Bottom Layer w0.254: v1@-10.1,-20.904 v1(-10.1,-20.8)
  Bottom Layer w0.305: v1@-10.1,-20.904 -9.7,-21.304 -9.7,-24.2
  Bottom Layer w0.356: v1(-24.21,-38.71) -9.7,-24.2
VDD: C1.1 C7.2 C13.2 C21.2 C22.2 C25.2 P1.7 R1.1 R5.1 R6.1 R11.1 U1.19 U1.67 U2.12 U2.15 U3.1 U5.3 | length 138.4
  Top Layer w0.254: U5.3@-33.6,-62.85 U5.3 ; U3.1 -25.16,-48.96 C21.2 ; -21.1,-50.8 -18.91,-48.61 -16.21,-48.61 -15.311,-49.509 -14.42,-49.509 U2.12 ; v1@-18.637,-39.81 -18.637,-38.719 U1.67 ; R11.1 -17.51,-51.06 -17.09,-51.48 U2.15 -13.28,-51.48 -12.91,-51.11 v1@-12.91,-50.91 ; U1.19 -9.818,-29.9 -9.437,-29.9 -9.345,-29.807 -9.203,-29.807 -9.11,-29.9 -9.017,-29.807 -8.875,-29.807 -8.783,-29.9 -7.92,-29.9 C13.2
  Top Layer w0.508: U5.3@-33.6,-62.85 -33.6,-61.1 C25.2 -33.6,-55.4 -29.15,-50.95 U3.1 -24.84,-50.95 -24.789,-50.899 -24.789,-50.798 -24.491,-50.5 -21.4,-50.5 -21,-50.9 ; -20.795,-50.902 -18.104,-50.902 -18.042,-50.964 -17.706,-50.964 R11.1
  Bottom Layer w0.254: C1.1@-19.833,-40.692 -19.735,-40.594 -19.735,-40.235 -19.008,-40.235 -18.91,-40.137 v1(-18.91,-39.81) -18.485,-40.235 -16.91,-41.81 R5.1 R1.1 -14.61,-43.26 -14.61,-44.561 -14.461,-44.71 -8.41,-44.71 -7.61,-43.91 -7.61,-42.21 -8.11,-41.71 -8.86,-41.71 R6.1 ; C22.2 -12.91,-51.11 v1(-12.91,-50.61) ; -9.01,-26.094 -9,-26.084
  Bottom Layer w0.406: v1(-18.91,-39.81) -18.91,-37.41 -11.31,-29.81 v1@-9.01,-29.81 ; -9,-26.084 -9,-20
  Bottom Layer w0.432: -13.8,-15.2 -9,-20
  Bottom Layer w0.457: v1(-33.8,-61.1) -33.8,-54.3 -20.192,-40.692 C1.1@-19.833,-40.692 ; P1.7 -23.32,-13.68 -21.8,-15.2 -13.8,-15.2 ; v1@-9.01,-29.81 -9.01,-26.094
  other v1: -9.11,-29.71
VEE: U1.29 U1.57 | length 31.9
  Top Layer w0.254: v1@-24.61,-37.81 -24.61,-37.507 U1.57 ; U1.29 -14.599,-27.499 -10.507,-23.407 -10.507,-22.838 v1(-10.512,-22.833)
  Bottom Layer w0.356: v1(-24.71,-37.81) -10.512,-23.612 v1(-10.512,-22.833)
pads on no net: D-IN.1 D-IN.2 D-IN.3 D-IN.4 D-IN.5 D-IN.6 U4.4 U5.4

## Polygon pours and split planes (outlines as drawn)
GND on Top Layer "GND_L01_P001" (solid, pour order 1): 3.25,-1.75 3.25,-71.25 -45,-71.25 -45,-1.75
no net on Top Layer "NONET_L01_P000" (solid, pour order 0): 3.4,-1.6
GND on Bottom Layer "GND_L02_P003" (solid, pour order 3): 3,-1.75 3,-71.25 -45.25,-71.25 -45.25,-1.75
no net on Bottom Layer "NONET_L04_P002" (solid, pour order 2): 3,-1.75

## Keep-outs
Keep-Out Layer:
  lines w0.254: -45.2,-71.51 -45.2,-1.51 3.35,-1.51 3.35,-71.51 -45.2,-71.51

## Other copper
Top Layer:
  region: -43.25,-55.1 -35.15,-55.1 -35.15,-60.5 -43.25,-60.5
  region net GND: -35.15,-65.5 -27.05,-65.5 -27.05,-70.9 -35.15,-70.9
  pour cut-out: -16.973,-24.527 -9.75,-31.75 -17.25,-39.25 -24.473,-32.027
  pour cut-out: 10.1,-24.8

## Silkscreen, mask and mechanical layers (free items; w line width, h text height)
Top Overlay:
  text "0 A+ A- B- B+ 0 VDD Vcc" at -39.05,-14.85 h0.9

## Text inside footprints (layer, text, board x,y; h text height)
C14: Bottom Overlay "+" at -27.46,-35.46 h1.02
C15: Bottom Overlay "+" at -36.36,-42.26 h1.5 r180
C19: Bottom Overlay "+" at -27.76,-17.36 h1.02
C20: Bottom Overlay "+" at -37.06,-23.56 h1.02 r180
D-IN: Bottom Overlay "39" at -2.158,-18.018 h1.27 r270; Bottom Overlay "40" at 0.382,-18.018 h1.27 r270; Bottom Overlay "2" at 0.382,-70.85 h1.27 r270; Bottom Overlay "1" at -2.158,-70.85 h1.27 r270
HVO: Top Overlay "2" at -41.328,-15.07 h1.02 r270; Top Overlay "1" at -43.868,-15.07 h1.02 r270; Top Overlay "15" at -43.868,-36.914 h1.02 r270; Top Overlay "16" at -41.328,-36.914 h1.02 r270
LVO: Top Overlay "2" at 0.382,-3.27 h1.27 r270; Top Overlay "1" at -2.158,-3.778 h1.27 r270; Top Overlay "7" at -2.158,-14.954 h1.27 r270; Top Overlay "8" at 0.382,-14.954 h1.27 r270
U1: Top Overlay "*" at -15.61,-40.41 h1.02 r135